# Altium PCB Remote Controller.PcbDoc
Units mm, origin at the board's own origin, x right, y up, seen from the top; angles counter-clockwise.
Board outline 123 x 88 mm, 2 copper layers (Top Layer, Bottom Layer); 117 components, 88 nets, 403 pads, 43 vias.
Unrouted connection lines stored in the file: 1.
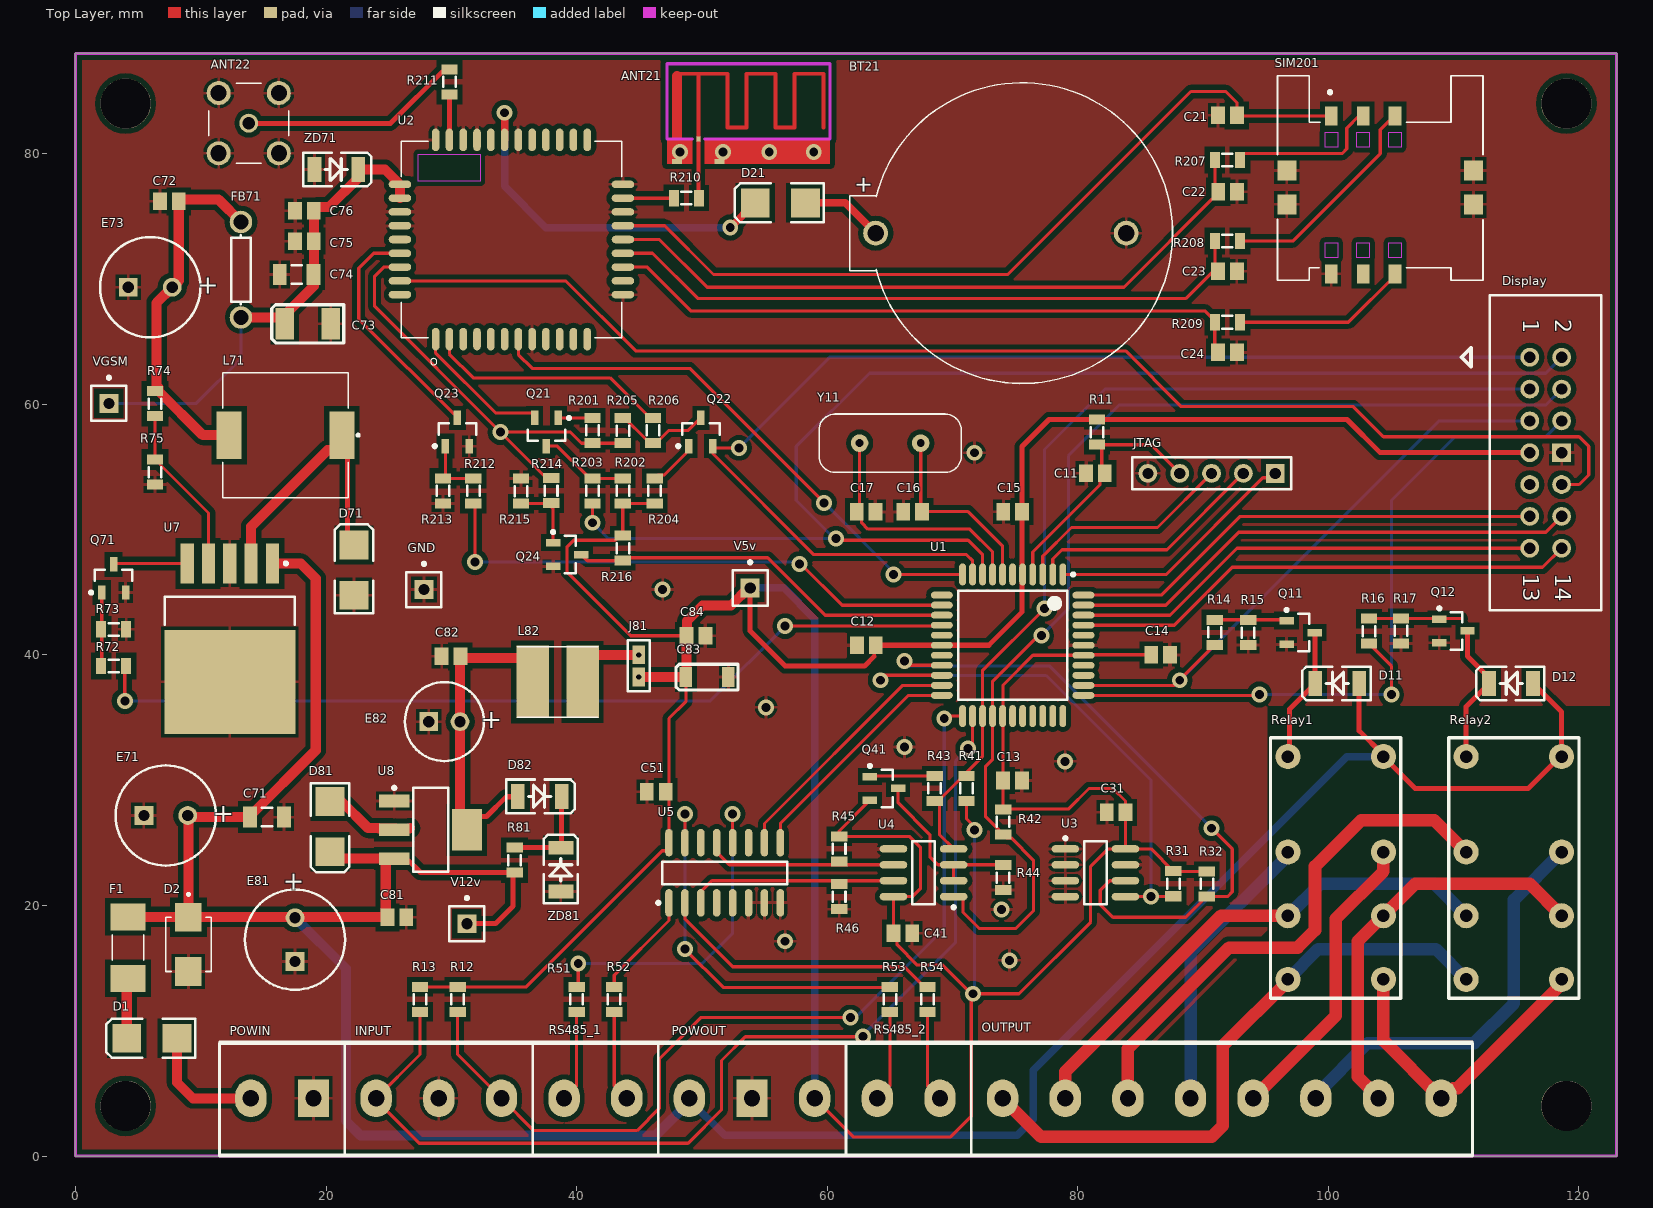
[diagram p0: Top Layer view]
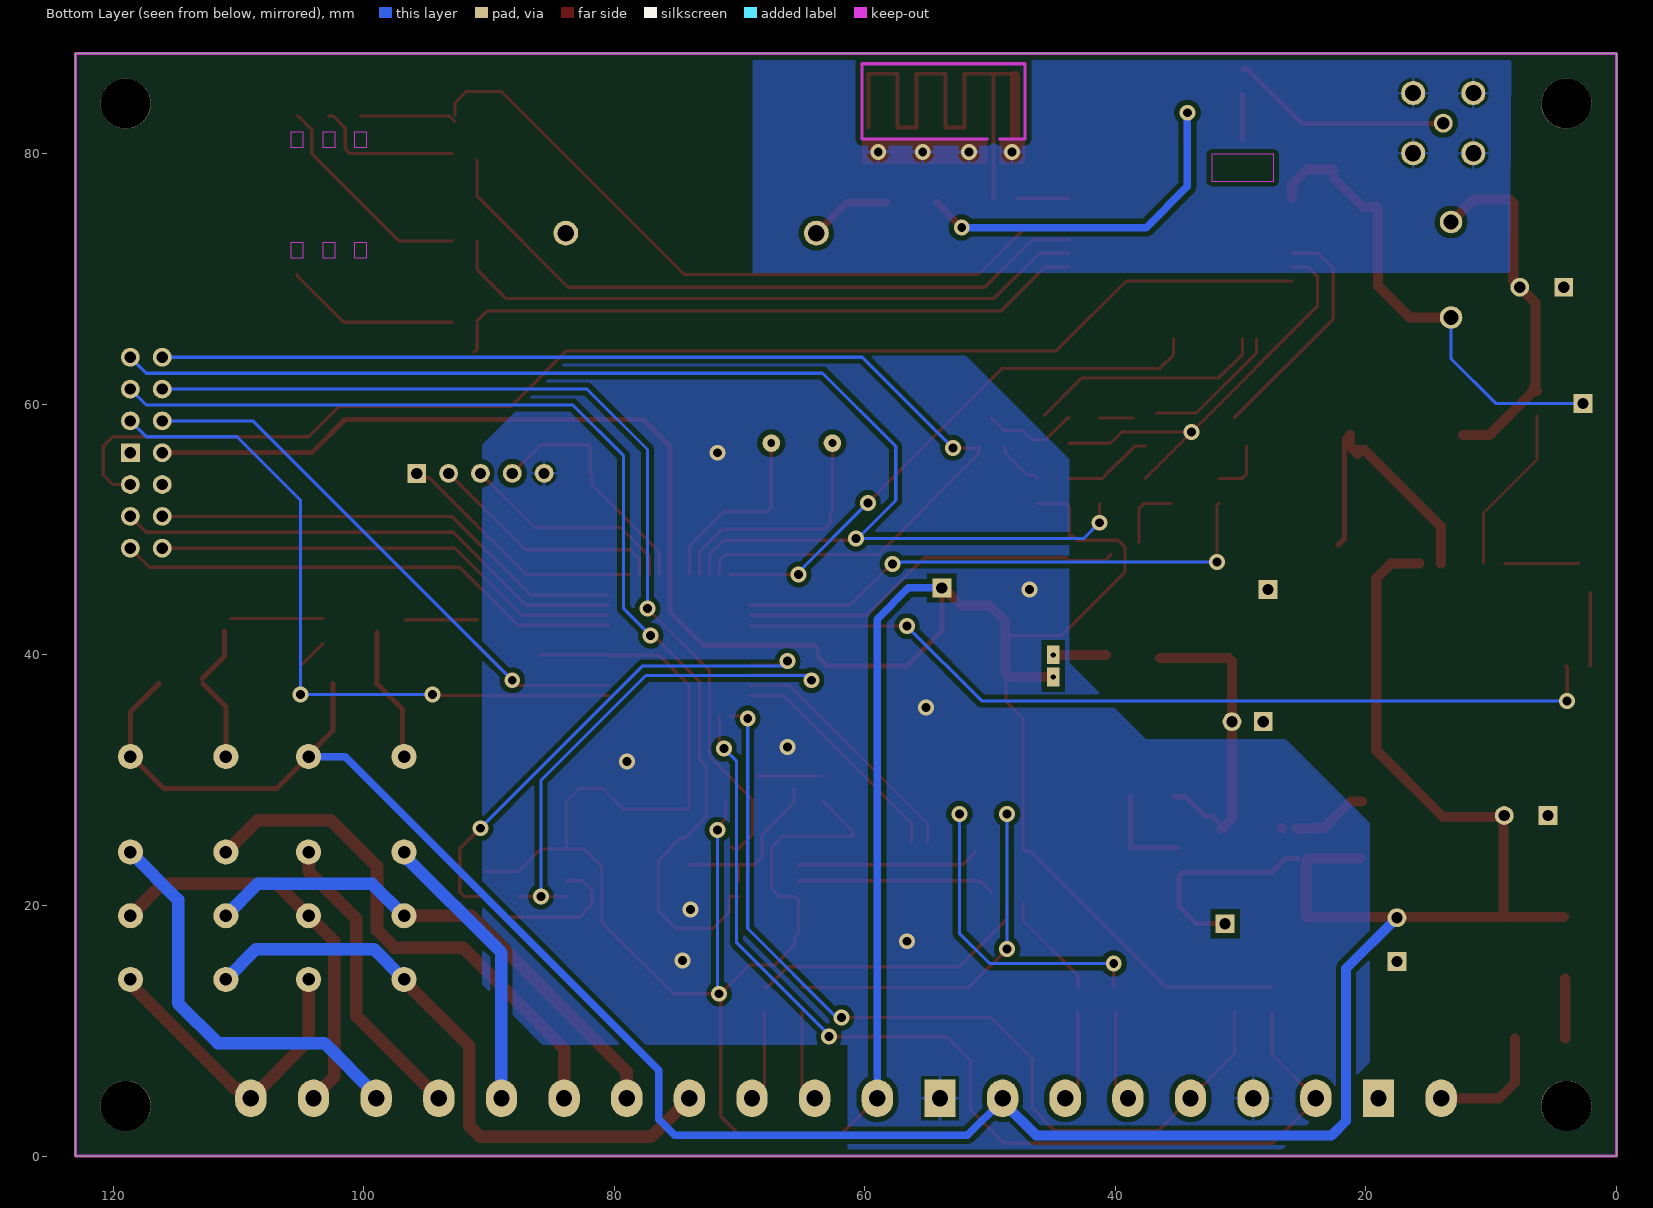
[diagram p1: Bottom Layer view, seen from below]

## Layer stack, top to bottom
Top Solder: solder mask 0.0102, Solder Resist, Dk 3.5
Top Layer: signal copper 0.0356
Dielectric 1: dielectric 0.32, FR-4, Dk 4.8
Bottom Layer: signal copper 0.0356
Bottom Solder: solder mask 0.0102, Solder Resist, Dk 3.5

## Board outline
0,0 123,0 123,88 0,88

## Design rules (kind name [scope] priority, off if disabled: settings)
Clearance [All] p1: gap=0.2 ignorepadtopadclearanceinfootprint=FALSE
ComponentClearance [All] p1: gap=0 collisioncheckmode=3 verticalgap=0 showdistances=FALSE
PolygonConnect [All] p1: connectstyle=Relief reliefconductorwidth=0.254 reliefentries=4 polygonreliefangle="90 Angle" airgapwidth=0.254
RoutingVias [All] p1: holewidth=0.711 width=1.27 viastyle="Through Hole" minholewidth=0.711 minwidth=1 maxholewidth=0.711 maxwidth=1.27
SolderMaskExpansion [All] p1: expansion=0.102 istentingtop=FALSE
Width [All] p1: maxlimit=1 minlimit=0.254 preferedwidth=0.254
29 further rules are at their usual default settings.

## Components (designator, comment, footprint, x,y, rotation, side; value= is the part's Value field where it differs from the comment)
ANT21 "PIFA_ANTENNA" PIFA_CONNECTOR 53.721,83.185 r0 top
ANT22 "SMA_CONNECTOR" LPRS_SMA_CONNECTOR 13.83,82.436 r0 top
BT21 "BH32T-C" BAT_BH32T-C 75.565,73.66 r270 top
C11 "Cap" C0805 81.407,54.483 r180 top value=100nF
C12 "Cap" C0805 63.119,40.767 r180 top value=100nF
C13 "Cap" C0805 74.791,29.972 r0 top value=100nF
C14 "Cap" C0805 86.614,40.005 r0 top value=100nF
C15 "Cap" C0805 74.803,51.435 r180 top value=100nF
C16 "Cap" C0805 66.814,51.435 r180 top value=22pF
C17 "Cap" C0805 63.107,51.435 r0 top value=22pF
C21 "Cap" C0805 91.948,83.058 r180 top value=100nF
C22 "Cap" C0805 91.96,76.962 r0 top value=22pF
C23 "Cap" C0805 91.948,70.612 r0 top value=22pF
C24 "Cap" C0805 91.948,64.135 r0 top value=22pF
C31 "Cap" C0805 83.058,27.432 r180 top value=100nF
C41 "Cap" C0805 66.04,17.78 r180 top value=100nF
C51 "Cap" C0805 46.355,29.083 r180 top value=100nF
C71 "Cap" C1206 15.287,27.051 r180 top value=1uF
C72 "Cap" C0805 7.493,76.2 r0 top value=100nF
C73 "Tantalium Cap" "Tantalium CASE B" 18.542,66.421 r0 top value=100uF
C74 "Cap" C1206 17.653,70.358 r0 top value=1uF
C75 "Cap" C0805 18.276,73.025 r0 top value=33pF
C76 "Cap" C0805 18.276,75.438 r0 top value=10pF
C81 "Cap" C0805 25.654,19.05 r180 top value=330nF
C82 "Cap" C0805 29.972,39.878 r0 top value=100nF
C83 "Tantalium Cap" "Tantalium CASE A" 50.419,38.227 r0 top value=10uF
C84 "Cap" C0805 49.53,41.529 r180 top value=100nF
D1 "1N4007" DO-214AC(SMA) 6.096,9.398 r90 top
D2 "SMBJ16A" DIOM4336X265N 9.017,16.891 r270 top
D11 "1N4148" "Mini MELF" 100.711,37.719 r180 top
D12 "1N4148" "Mini MELF" 114.582,37.719 r180 top
D21 "SS14" DO-214AC(SMA) 56.261,76.073 r90 top
D71 "SS34" DO-214AC(SMA) 22.225,46.765 r0 top
D81 "1N4007" DO-214AC(SMA) 20.32,26.289 r180 top
D82 "1N4148" "Mini MELF" 37.056,28.702 r0 top
Display "Header 7X2" HDR2X7 116.078,63.754 r270 top value="IDC Box"
E71 "94SS227X06R3EBP" E 7.211,27.178 r180 top value=220uF/25v
E73 "94SA107X0016EBP" E 5.969,69.342 r180 top value=1000uF/10v
E81 "94SA107X0016EBP" E 17.526,17.272 r270 top value=1000uF/16v
E82 "94SC226X0016DBP" D 29.444,34.671 r180 top value=220uF/16v
F1 "Fuse SMD" "FUSE SMD 2410" 4.191,16.637 r90 top value=500mA
FB71 "Ferrite Bead" AXIAL-0.3 13.208,70.739 r270 top value=270
GND "Socket" PIN1 27.813,45.212 r0 top
INPUT "KF300" HDR1X3#1 31.54,4.6 r180 top value=KF300-3P
J81 "Jumper" HDR1X2#1 44.958,40.385 r270 top
JTAG "Right Female Header 5-Pin" HDR1X5 95.758,54.483 r180 top
L71 "Inductor" "IND POWER RH74" 16.764,57.531 r180 top value=100uH
L82 "Inductor" "IND POWER CD54" 38.481,37.846 r0 top value=220uH
OUTPUT "KF129" HDR1X8 82.61,4.6 r0 top
POWIN "KF300" HDR1X2#2 17.77,4.6 r180 top value=KF300-2P
POWOUT "KF300" HDR1X3#2 51.46,4.6 r0 top value=KF300-3P
Q11 "PMBT3904" SOT-23A_N 97.79,41.783 r0 top
Q12 "PMBT3904" SOT-23A_N 109.982,41.91 r0 top
Q21 "PMBT3904" SOT-23A_N 37.592,57.785 r270 top
Q22 "PMBT3904" SOT-23A_N 49.911,57.785 r90 top
Q23 "PMBT3904" SOT-23A_N 30.48,57.785 r90 top
Q24 "PMBT3904" SOT-23A_N 39.243,48.006 r0 top
Q41 "PMBT3906" SOT-23A_N 64.534,29.337 r0 top
Q71 "PMBT3904" SOT-23A_N 3.048,46.101 r90 top
R11 "Res" R0805 81.534,57.785 r90 top value=4.7K
R12 "Res" R0805 30.5,12.5 r270 top value=4.7K
R13 "Res" R0805 27.5,12.5 r270 top value=4.7K
R14 "Res" R0805 90.932,41.799 r270 top value=4.7K
R15 "Res" R0805 93.599,41.783 r270 top value=47K
R16 "Res" R0805 103.251,41.894 r270 top value=4.7K
R17 "Res" R0805 105.791,41.91 r270 top value=47K
R31 "Res" R0805 87.63,21.733 r90 top value=10K
R32 "Res" R0805 90.297,21.717 r90 top value=10K
R41 "Res" R0805 71.12,29.337 r270 top value=220K
R42 "Res" R0805 74.041,26.67 r90 top value=220K
R43 "Res" R0805 68.58,29.337 r270 top value=7.5K
R44 "Res" R0805 74.041,22.225 r270 top value=20K
R45 "Res" R0805 60.96,24.511 r270 top value=10K
R46 "Res" R0805 60.96,20.701 r270 top value=10K
R51 "Res" R0805 40,12.5 r90 top value=10
R52 "Res" R0805 43,12.5 r90 top value=10
R53 "Res" R0805 65,12.5 r90 top value=10
R54 "Res" R0805 68,12.5 r90 top value=10
R72 "Res" R0805 3.048,39.116 r0 top value=4.7K
R73 "Res" R0805 3.048,42.037 r0 top value=47K
R74 "Res" R0805 6.35,60.055 r90 top value=2.2K
R75 "Res" R0805 6.35,54.594 r270 top value=1K
R81 "Res" R0805 35.052,23.622 r270 top value=10K
R201 "Res" R0805 41.275,57.912 r90 top value=4.7K
R202 "Res" R0805 43.688,53.086 r90 top value=4.7K
R203 "Res" R0805 41.275,53.086 r270 top value=470
R204 "Res" R0805 46.228,53.086 r90 top value=4.7K
R205 "Res" R0805 43.688,57.896 r270 top value=4.7K
R206 "Res" R0805 46.101,57.912 r270 top value=470
R207 "Res" R0805 91.948,79.502 r180 top value=47
R208 "Res" R0805 91.948,73.025 r180 top value=47
R209 "Res" R0805 91.948,66.548 r0 top value=47
R210 "Res" R0805 48.768,76.454 r180 top value=0
R211 "Res" R0805 29.845,85.725 r90 top value=0
R212 "Res" R0805 31.75,53.086 r270 top value=4.7K
R213 "Res" R0805 29.337,53.086 r270 top value=47K
R214 "Res" R0805 37.973,53.102 r90 top value=4.7K
R215 "Res" R0805 35.56,53.07 r90 top value=47K
R216 "Res" R0805 43.688,48.514 r90 top value=4.7K
Relay1 "2C Relay 12V" "Relay v23105-a5001-a201" 100.584,22.987 r270 top
Relay2 "2C Relay 12V" "Relay v23105-a5001-a201" 114.808,22.987 r270 top
RS485_1 "KF300" HDR1X2#3 40.23,4.6 r0 top value=KF300-2P
RS485_2 "KF300" HDR1X2#3 65.23,4.6 r0 top value=KF300-2P
SIM201 "SIM Card Holder 6PIN" "SIM Card Holder" 104.14,76.708 r180 top
U1 "ATmega32A-AU" 44A_N 74.803,40.767 r270 top
U2 "SIM800C" LCC110P1570X1760X250-42N 34.798,73.152 r90 top
U3 "AT24C02BN-SP25-B" 8S1_N 81.407,22.606 r0 top
U4 "MAX485CSA" NSO8_N 67.691,22.606 r180 top
U5 "HEF4052BT" 751B-05_N 51.816,22.606 r90 top
U7 "LM2596S-ADJ" TS5B_N 12.319,41.296 r270 top
U8 "Volt Reg" SOT223_N 28.342,26.035 r0 top
V5v "Socket" PIN1 53.848,45.339 r0 top
V12v "Socket" PIN1 31.242,18.542 r0 top
VGSM "Socket" PIN1 2.667,60.071 r0 top
Y11 "Crystal Oscillator" "XTAL THD" 65.024,56.896 r180 top value="11.0592 MHz"
ZD71 "Diode Zener" "Mini MELF" 20.828,78.74 r0 top value=5.1v
ZD81 "Diode Zener" "Mini MELF" 38.735,22.86 r90 top value=5.6v

## Footprints (in the part's own frame and the unit in brackets; to place one, negate y for a bottom-side part, rotate by r counter-clockwise, add the part's x,y. Pads: shape width x height; smd on the part's side, far side on the other; paste and mask are expansions set on the pad)
8S1_N [mm] "SOIC, 8-Leads, Body 4.9x3.9mm, Pitch 1.27mm, IPC Medium Density"
  oval 2.2x0.6 smd: 1(-2.4,1.905) 2(-2.4,0.635) 3(-2.4,-0.635) 4(-2.4,-1.905) 5(2.4,-1.905) 6(2.4,-0.635) 7(2.4,0.635) 8(2.4,1.905)
  silkscreen extent -2.52,-2.5 0.9,2.88, body extent -2,-2.5 2,2.5, height 1.75
44A_N [mm] "Thin QFP, 44-Leads, Body 10x10mm, Pitch 0.8mm, IPC Medium Density"
  oval 1.75x0.55 smd: 1(-5.65,4) 2(-5.65,3.2) 3(-5.65,2.4) 4(-5.65,1.6) 5(-5.65,0.8) 6(-5.65,0) 7(-5.65,-0.8) 8(-5.65,-1.6) 9(-5.65,-2.4) 10(-5.65,-3.2) 11(-5.65,-4) 23(5.65,-4) 24(5.65,-3.2) 25(5.65,-2.4) 26(5.65,-1.6) 27(5.65,-0.8) 28(5.65,0) 29(5.65,0.8) 30(5.65,1.6) 31(5.65,2.4) 32(5.65,3.2) 33(5.65,4)
  oval 0.55x1.75 smd: 12(-4,-5.65) 13(-3.2,-5.65) 14(-2.4,-5.65) 15(-1.6,-5.65) 16(-0.8,-5.65) 17(0,-5.65) 18(0.8,-5.65) 19(1.6,-5.65) 20(2.4,-5.65) 21(3.2,-5.65) 22(4,-5.65) 34(4,5.65) 35(3.2,5.65) 36(2.4,5.65) 37(1.6,5.65) 38(0.8,5.65) 39(0,5.65) 40(-0.8,5.65) 41(-1.6,5.65) 42(-2.4,5.65) 43(-3.2,5.65) 44(-4,5.65)
  silkscreen extent -5.77,-4.35 4.35,4.95, body extent -5,-5 5,5, height 1.2
751B-05_N [mm] "SOIC, 16-Leads, Body 9.9x3.9mm, Pitch 1.27mm, IPC Medium Density"
  oval 2.2x0.6 smd: 1(-2.4,4.445) 2(-2.4,3.175) 3(-2.4,1.905) 4(-2.4,0.635) 5(-2.4,-0.635) 6(-2.4,-1.905) 7(-2.4,-3.175) 8(-2.4,-4.445) 9(2.4,-4.445) 10(2.4,-3.175) 11(2.4,-1.905) 12(2.4,-0.635) 13(2.4,0.635) 14(2.4,1.905) 15(2.4,3.175) 16(2.4,4.445)
  silkscreen extent -2.52,-5 0.9,5.42, body extent -2,-5 2,5, height 1.75
AXIAL-0.3 [mm] "Axial Device, Thru-Hole; 2 Leads; 0.3 in Pin Spacing"
  round 1.8 hole 1.2: 1(-3.81,0) 2(3.81,0)
  silkscreen extent -2.77,-0.76 2.77,0.76
BAT_BH32T-C [mil]
  round 78 hole 52: NEG(0,326.77) POS(0,-460.63)
  silkscreen extent -473,-541 473,472, body extent -475,-535 475,475, height 310
C0805 [mm] "Chip Capacitor, Body 2.0x1.3mm, IPC High Density"
  rect 1.1x1.4 smd: 1(-0.75,0) 2(0.75,0)
  body extent -1.1,-0.72 1.1,0.72, height 1.4
C1206 [mm] "Chip Capacitor, Body 3.2x1.6mm, IPC High Density"
  rect 1.1x1.7 smd: 1(-1.35,0) 2(1.35,0)
  silkscreen extent -0.4,-0.75 0.4,0.75, body extent -1.7,-0.9 1.7,0.9, height 1.3
D [mm] "Capacitor, Electrolytic, Radial; Body 6.3 x 9.8 mm (Dia.xH typ); Pin Spacing 2.5 mm (typ)"
  round 1.5 hole 0.9: 1(-1.25,0)
  rect 1.5x1.5 hole 0.9: 2(1.25,0)
  silkscreen extent -3.15,-3.15 3.15,3.15
DIOM4336X265N [mm]
  rect 2.28x2.12 smd: A(2.165,0) C(-2.165,0)
  silkscreen extent -4.1,-1.81 2.16,1.81
DO-214AC(SMA) [mm]
  rect 2.3x2.3 smd: 1(0,-2.003) 2(0,2.003)
  silkscreen extent -1.55,-3.45 1.55,3.65, body extent -1.4,-2.75 1.4,2.75, height 2.6
E [mm] "Capacitor, Electrolytic, Radial; Body 8 x 10.5 mm (Dia.xH typ); Pin Spacing 3.5 mm (typ)"
  round 1.5 hole 0.9: 1(-1.75,0)
  rect 1.5x1.5 hole 0.9: 2(1.75,0)
  silkscreen extent -4,-4 4,4
"FUSE SMD 2410" [mm]
  rect 2.15x2.8 smd: 1(-2.455,0) 2(2.455,0)
  silkscreen extent -1,-1.27 1,1.27
HDR1X2#1 [mm] "Connector; Header; 2 Position"
  rect 1.5x1 hole 0.4: 1(0.38,0) 2(2.16,0)
  silkscreen extent -0.76,-0.89 3.3,0.89
HDR1X2#2 [mm] "Connector; Header; 2 Position"
  rect 2.5x3 hole 1.3: 1(-1.23,0)
  oval 2.5x3 hole 1.3: 2(3.77,0)
  silkscreen extent -3.73,-4.5 6.27,4.5
HDR1X2#3 [mm] "Connector; Header; 2 Position"
  oval 2.5x3 hole 1.3: 1(-1.23,0) 2(3.77,0)
  silkscreen extent -3.73,-4.5 6.27,4.5
HDR1X3#1 [mm] "Connector; Header; 3 Position"
  oval 2.5x3 hole 1.3: 1(-2.46,0) 2(2.54,0) 3(7.54,0)
  silkscreen extent -4.96,-4.5 10.04,4.5
HDR1X3#2 [mm] "Connector; Header; 3 Position"
  oval 2.5x3 hole 1.3: 1(-2.46,0) 3(7.54,0)
  rect 2.5x3 hole 1.3: 2(2.54,0)
  silkscreen extent -4.96,-4.5 10.04,4.5
HDR1X5 [mm] "Connector; Header; 5 Position"
  rect 1.5x1.5 hole 0.9: 1(0,0)
  round 1.5 hole 0.9: 2(2.54,0) 3(5.08,0) 4(7.62,0) 5(10.16,0)
  silkscreen extent -1.27,-1.27 11.43,1.27
HDR1X8 [mm] "Connector; Header; 8 Position"
  oval 2.5x3 hole 1.3: 1(-8.61,0) 2(-3.61,0) 3(1.39,0) 4(6.39,0) 5(11.39,0) 6(16.39,0) 7(21.39,0) 8(26.39,0)
  silkscreen extent -11.11,-4.5 28.89,4.5
HDR2X7 [mm] "Connector; Header; 7x2 Position"
  round 1.5 hole 0.9: 1(0,0) 2(0,2.54) 3(2.54,0) 4(2.54,2.54) 5(5.08,0) 6(5.08,2.54) 7(7.62,0) 9(10.16,0) 10(10.16,2.54) 11(12.7,0) 12(12.7,2.54) 13(15.24,0) 14(15.24,2.54)
  rect 1.5x1.5 hole 0.9: 8(7.62,2.54)
  silkscreen extent -4.96,-3.18 20.19,5.72
"IND POWER CD54" [mm] "SMD Power Inductor ; Size:5*5*4"
  rect 2.6x5.8 smd: 1(-2,0) 2(2,0)
  silkscreen extent -3.21,-2.81 3.21,2.81, body extent -2,-2 2,2, height 4.5
"IND POWER RH74" [mm] "SMD Power Inductor ; Size:7*7*4"
  rect 2x3.8 smd: 1(-4.5,0) 2(4.5,0)
  silkscreen extent -5.89,-5 5,5
LCC110P1570X1760X250-42N [mm]
  oval 1.8x0.6 smd: 1(-7.95,6.05) 2(-7.95,4.95) 3(-7.95,3.85) 4(-7.95,2.75) 5(-7.95,1.65) 6(-7.95,0.55) 7(-7.95,-0.55) 8(-7.95,-1.65) 9(-7.95,-2.75) 10(-7.95,-3.85) 11(-7.95,-4.95) 12(-7.95,-6.05) 22(7.95,-6.05) 23(7.95,-4.95) 24(7.95,-3.85) 25(7.95,-2.75) 26(7.95,-1.65) 27(7.95,-0.55) 28(7.95,0.55) 29(7.95,1.65) 30(7.95,2.75) 31(7.95,3.85) 32(7.95,4.95) 33(7.95,6.05)
  oval 0.6x1.8 smd: 13(-4.4,-8.9) 14(-3.3,-8.9) 15(-2.2,-8.9) 16(-1.1,-8.9) 17(0,-8.9) 18(1.1,-8.9) 19(2.2,-8.9) 20(3.3,-8.9) 21(4.4,-8.9) 34(4.4,8.9) 35(3.3,8.9) 36(2.2,8.9) 37(1.1,8.9) 38(0,8.9) 39(-1.1,8.9) 40(-2.2,8.9) 41(-3.3,8.9) 42(-4.4,8.9)
  Keep-Out Layer region: 6.8,2.483 4.656,2.483 4.656,7.43 6.8,7.43
  silkscreen extent -10,-8.8 7.85,8.8
LPRS_SMA_CONNECTOR [mm]
  round 1.508 hole 1: 1(0,0)
  round 1.92 hole 1.28: G1(-2.4,2.4) G2(-2.4,-2.4) G3(2.4,-2.4) G4(2.4,2.4)
  silkscreen extent -3.2,-3.2 3.2,3.2, body extent -3.25,-3.25 3.25,3.25, height 13.6
"Mini MELF" [mm] "Mini MELF; 3.5mm*1.45mm"
  rect 1.1x2 smd: 1(-1.75,0) 2(1.75,0)
  silkscreen extent -2.67,-1.35 2.79,1.35
NSO8_N [mm] "SOIC, 8-Leads, Body 4.9x3.9mm, Pitch 1.27mm, IPC Medium Density"
  oval 2.2x0.6 smd: 1(-2.4,1.905) 2(-2.4,0.635) 3(-2.4,-0.635) 4(-2.4,-1.905) 5(2.4,-1.905) 6(2.4,-0.635) 7(2.4,0.635) 8(2.4,1.905)
  silkscreen extent -2.53,-2.5 0.9,2.88, body extent -2,-2.5 2,2.5, height 1.75
PIFA_CONNECTOR [mm]
  rect 0.3x0.4 smd: 1(-4,-2)
  rect 0.8x0.4 smd mask+0.102: G1(-5.7,-3.8) G2(-2.3,-3.8)
  Top Layer region: -3.5,-2 6.5,-2 6.5,-4 -3.5,-4
  Top Layer region: -6.5,-2 -4.5,-2 -4.5,-4 -6.5,-4
  Top Layer pour cut-out: 10,-2
  Top Layer pour cut-out: 10,-2
  Top Layer lines w0.3: -5.7,3.2 -4,3.2 ; -4,-2 -4,3.2 ; 5.99,-1.1 5.99,3.2 3.66,3.2 3.66,-1.1 2.16,-1.1 2.16,3.2 -0.17,3.2 -0.17,-1.1 -1.67,-1.1 -1.67,3.2 -4,3.2
  Top Layer lines w0.8: -5.7,-1.905 -5.7,3
  Keep-Out Layer lines w0.254: -4.5,-2 -6.5,-2 -6.5,4 6.5,4 6.5,-2 -3.5,-2
PIN1 [mm] "Connector; Plug"
  rect 1.5x1.5 hole 0.9: 1(0,0)
  silkscreen extent -1.4,-1.4 1.4,2.17
R0805 [mm] "Chip Resistor, Body 2x1.3mm, IPC High Density"
  rect 0.8x1.3 smd: 1(-1,0) 2(1,0)
  silkscreen extent -0.4,-0.5 0.4,0.5, body extent -1.05,-0.65 1.05,0.65, height 0.9
"Relay v23105-a5001-a201" [mm]
  round 2 hole 1: 1(-8.89,-3.81) 4(-1.27,-3.81) 6(3.81,-3.81) 8(8.89,-3.81) 9(8.89,3.81) 11(3.81,3.81) 13(-1.27,3.81) 16(-8.89,3.81)
  silkscreen extent -10.4,-5.2 10.4,5.2, body extent -10.14,-4.99 10.06,5.01, height 11.41
"SIM Card Holder" [mm] "6 Position Card Connector SIM Card Surface Mount, Right Angle Gold"
  rect 1x1.5 smd: 1(3.9,-6.3) 2(1.36,-6.3) 3(-1.18,-6.3) 4(3.9,6.3) 5(1.36,6.3) 6(-1.18,6.3)
  rect 1.5x1.6 smd: S1(-7.45,0.75) S2(-7.45,-1.95) S3(7.45,0.75) S4(7.45,-1.95)
  Keep-Out Layer region: -0.68,3.8 -1.68,3.8 -1.68,5 -0.68,5
  Keep-Out Layer region: 1.86,3.8 0.86,3.8 0.86,5 1.86,5
  Keep-Out Layer region: 4.4,3.8 3.4,3.8 3.4,5 4.4,5
  Keep-Out Layer region: -0.68,-5 -1.68,-5 -1.68,-3.8 -0.68,-3.8
  Keep-Out Layer region: 1.86,-5 0.86,-5 0.86,-3.8 1.86,-3.8
  Keep-Out Layer region: 4.4,-5 3.4,-5 3.4,-3.8 4.4,-3.8
  silkscreen extent -8.2,-9.5 8.2,6.8
SOT223_N [mm] "SOT223, 4-Leads, Body 6.5x3.5mm, Pitch 2.3mm, Lead Span 7mm, IPC Medium Density"
  rect 2.4x1 smd: 1(-2.9,2.3) 2(-2.9,0) 3(-2.9,-2.3)
  rect 2.4x3.3 smd: 4(2.9,0)
  silkscreen extent -3.02,-3.35 1.4,3.47, body extent -1.85,-3.35 1.85,3.35, height 1.7
SOT-23A_N [mm] "SOT23, 3-Leads, Body 2.9x1.3mm, Pitch 0.95mm, Lead Span 2.3mm, IPC Medium Density"
  rect 1.15x0.6 smd: 1(-1.125,0.95) 2(-1.125,-0.95) 3(1.125,0)
  silkscreen extent -1.25,-1.5 0.7,1.92, body extent -0.7,-1.5 0.7,1.5, height 1.09
"Tantalium CASE A" [mm]
  rect 1x1.6 smd paste+0.038 mask+0.038: 1(-1.7,0) 2(1.7,0)
  silkscreen extent -2.5,-1.02 2.45,1.02, body extent -1.7,-0.9 1.7,0.9, height 1.8
"Tantalium CASE B" [mm]
  rect 1.5x2.5 smd paste+0.038 mask+0.038: 1(-1.831,0) 2(1.832,0)
  silkscreen extent -2.88,-1.53 2.88,1.53, body extent -1.83,-1.4 1.83,1.4, height 1.95
TS5B_N [mm] "D2-PAK, 6-Leads, Body 8.6x10.2mm, Pitch 1.7mm, Lead Span 14.1mm, IPC Medium Density"
  rect 3.2x1.05 smd: 1(-6,3.4) 2(-6,1.7) 3(-6,0) 4(-6,-1.7) 5(-6,-3.4)
  rect 8.3x10.45 smd: 6(3.45,0)
  silkscreen extent -6.12,-5.2 -1.1,5.2, body extent -3.35,-5.2 6.05,5.2, height 4.65
"XTAL THD" [mm]
  round 1.4 hole 0.63: 1(-2.44,0) 2(2.44,0)
  silkscreen extent -5.68,-2.33 5.68,2.33

## Part data
ANT21: "RF Connectors / Printed and Surface-mount Antenna", Package=None, Availability="In Stock", Check_prices=https://www.snapeda.com/parts/SMA%20CONNECTOR/LPRS/view-part/?ref=eda, MF=LPRS, MP="SMA CONNECTOR", Price=None, Purchase-URL="https://pricing.snapeda.com/search/part/SMA CONNECTOR/?ref=eda", SnapEDA_Link=https://www.snapeda.com/parts/SMA%20CONNECTOR/LPRS/view-part/?ref=snap
ANT22: "RF Connectors / Coaxial Connectors SMA Coaxial Right angled", Package=None, Availability="In Stock", Check_prices=https://www.snapeda.com/parts/SMA%20CONNECTOR/LPRS/view-part/?ref=eda, MF=LPRS, MP="SMA CONNECTOR", Price=None, Purchase-URL="https://pricing.snapeda.com/search/part/SMA CONNECTOR/?ref=eda", SnapEDA_Link=https://www.snapeda.com/parts/SMA%20CONNECTOR/LPRS/view-part/?ref=snap
BT21: "BATTERY HOLDER COIN 20MM PC PIN", Package=None, Availability="In Stock", Check_prices=https://www.snapeda.com/parts/BH32T-C/Memory+Protection+Devices/view-part/?ref=eda, MF=MPD, MP=BH32T-C, Price=None, Purchase-URL=https://pricing.snapeda.com/search/part/BH32T-C/?ref=eda, SnapEDA_Link=https://www.snapeda.com/parts/BH32T-C/Memory+Protection+Devices/view-part/?ref=snap
C11 C12 C13 C14 C15 C16 C17 C21 C22 C23 C24 C31 C41 C51 C71 C72 C74 C75 C76 C81 C82 C84: "Capacitor"
C73 C83: library part "Cap Pol2", "Polarized Capacitor Tantalium"
D1 D81: library part Diode, "Default Diode", Code_JEDEC=DO-214-AB, LatestRevisionDate=17-Jul-2002, LatestRevisionNote="Re-released for DXP Platform.", PackageDescription="DO-214-AB/SMC; 2 C-Bend Leads; Body 7.9 x 5.9 mm, inc. leads (LxW)", PackageReference=SMC, PackageVersion=Sep-1996, Published=8-Jun-2000, Publisher="Altium Limited"
D2: library part SMBJ12A, "15.6V Clamp 17.5A Ipp Tvs Diode Surface Mount DO-214AA (SMB)", Package="SMB-2 Fairchild Semiconductor", Availability="In Stock", Check_prices=https://www.snapeda.com/parts/SMBJ12A/Onsemi/view-part/?ref=eda, MF="ON Semiconductor", MP=SMBJ12A, Price=None, Purchase-URL=https://pricing.snapeda.com/search/part/SMBJ12A/?ref=eda, SnapEDA_Link=https://www.snapeda.com/parts/SMBJ12A/Onsemi/view-part/?ref=snap
D11 D12 D82: library part "Diode 1N4148", "High Conductance Fast Diode", PackageDescription=Diode
D21: library part 1N6095, "Schottky Rectifier", ComponentLink1Description="Manufacturer Link", ComponentLink1URL=http://www.irf.com/, ComponentLink2Description=Datasheet, ComponentLink2URL=http://www.irf.com/product-info/datasheets/data/1n6096.pdf, DatasheetVersion=Dec-1997, LatestRevisionDate=17-Jul-2002, LatestRevisionNote="Re-released for DXP Platform.", Note="No PCB Footprint Available", PackageReference=DO-203AA, Published=8-Jun-2000, Publisher="Altium Limited"
D71: library part SS36, "Schottky Rectifier", PackageDescription="DO-214-AB/SMC; 2 C-Bend Leads; Body 7.9 x 5.9 mm, inc. leads (LxW)"
Display: "Header, 7-Pin, Dual row", LatestRevisionDate=17-Jul-2002, LatestRevisionNote="Re-released for DXP Platform.", Publisher="Altium Limited"
E71: "Solid Aluminum Capacitor with Organic Semiconductor Electrolyte: 220uF, 6.3V, Bulk Pack", ComponentLink1Description="Manufacturer Link", ComponentLink1URL=http://www.vishay.com/, ComponentLink2Description=Datasheet, ComponentLink2URL=http://www.vishay.com/docs/90008/94ss.pdf, DatasheetDocument=23-May-2001, DrillSize="Nominal, Rounded to the nearest 0.1mm", Note="Part Numbers shown are for ± 20% capacitance tolerance (X0).", PackageReference=E, PCB_Layout="Complies with Manufacturer's Recommendation.", Published=19-Mar-2004, Publisher="Altium Limited"
E73 E81: "Solid Aluminum Capacitor with Organic Semiconductor Electrolyte: 100uF, 16V, Bulk Pack", ComponentLink1Description="Manufacturer Link", ComponentLink1URL=http://www.vishay.com/, ComponentLink2Description=Datasheet, ComponentLink2URL=http://www.vishay.com/docs/90003/94sa.pdf, DatasheetDocument=29-Jun-2001, DrillSize="Nominal, Rounded to the nearest 0.1mm", Note="Part Numbers shown are for ± 20% capacitance tolerance (X0).", PackageReference=E, PCB_Layout="Complies with Manufacturer's Recommendation.", Published=19-Mar-2004, Publisher="Altium Limited"
E82: "Solid Aluminum Capacitor with Organic Semiconductor Electrolyte: 22uF, 16V, Bulk Pack", ComponentLink1Description="Manufacturer Link", ComponentLink1URL=http://www.vishay.com/, ComponentLink2Description=Datasheet, ComponentLink2URL=http://www.vishay.com/docs/90004/94sc.pdf, DatasheetDocument=23-May-2001, DrillSize="Nominal, Rounded to the nearest 0.1mm", Note="Part Numbers shown are for ± 20% capacitance tolerance (X0).", PackageReference=D, PCB_Layout="Complies with Manufacturer's Recommendation.", Published=19-Mar-2004, Publisher="Altium Limited"
F1: "2410 SMT Fuse", Package="SMD-2 Bel Fuse", Availability=Warning, MF="Bel Fuse", MP=0679L1000-05, Price=None, Purchase-URL=https://pricing.snapeda.com/search/part/0679L1000-05/?ref=eda, SnapEDA_Link=https://www.snapeda.com/parts/0679L1000-05/Bel%20Fuse/view-part/1313867/?ref=snap
INPUT POWOUT: library part "Header 3", "Header, 3-Pin", LatestRevisionDate=17-Jul-2002, LatestRevisionNote="Re-released for DXP Platform.", Publisher="Altium Limited"
J81 POWIN RS485_1 RS485_2: library part "Header 2", "Header, 2-Pin", LatestRevisionDate=17-Jul-2002, LatestRevisionNote="Re-released for DXP Platform.", Publisher="Altium Limited"
JTAG: library part "Header 5", "Header, 5-Pin", LatestRevisionDate=17-Jul-2002, LatestRevisionNote="Re-released for DXP Platform.", Publisher="Altium Limited"
L71 L82: "Inductor SMD", PackageDescription=Inductor
OUTPUT: library part "Header 8", "Header, 8-Pin", LatestRevisionDate=17-Jul-2002, LatestRevisionNote="Re-released for DXP Platform.", Publisher="Altium Limited"
Q11 Q12 Q21 Q22 Q23 Q24 Q71: library part BC817-25, "NPN General Purpose Amplifier", ComponentLink1Description="Manufacturer Link", ComponentLink1URL=http://www.fairchildsemi.com/, ComponentLink2Description="Discontinuation Notice", ComponentLink2URL=http://www.fairchildsemi.com/obsolete/obs.jsp, DatasheetVersion=1997, LatestRevisionDate=20-Nov-2009, LatestRevisionNote="IPC-7351 Footprint Added.", PackageDescription="3-Pin SOT-23 Package 0.95 mm Pitch, 2.3 mm Lead Span", PackageReference=SOT-23A, PackageVersion=Sep-1998, Published=8-Jun-2000, Publisher="Altium Limited"
Q41: library part BC807-25, "PNP General Purpose Amplifier", ComponentLink1Description="Manufacturer Link", ComponentLink1URL=http://www.fairchildsemi.com/, ComponentLink2Description=Datasheet, ComponentLink2URL=http://www.fairchildsemi.com/ds/BC%2FBC807.pdf, DatasheetVersion=1997, LatestRevisionDate=20-Nov-2009, LatestRevisionNote="IPC-7351 Footprint Added.", PackageDescription="3-Pin SOT-23 Package 0.95 mm Pitch, 2.3 mm Lead Span", PackageReference=SOT-23A, PackageVersion=Sep-1998, Published=8-Jun-2000, Publisher="Altium Limited"
R11 R12 R13 R14 R15 R16 R17 R31 R32 R41 R42 R43 R44 R45 R46 R51 R52 R53 R54 R72 R73 R74 R75 R81 R201 R202 R203 R204 R205 R206 R207 R208 R209 R210 R211 R212 R213 R214 R215 R216: "Resistor", PackageDescription="Chip Resistor"
Relay1 Relay2: library part Relay-8Pin, "2C Telecommunication Relay"
SIM201: "6 Position Card Connector SIM Card Surface Mount, Right Angle Gold", Package=None, Availability=Unavailable, MF="Wurth Electronics", MP=693010020611, Price=None, SnapEDA_Link=https://www.snapeda.com/parts/693010020611/Wurth%20Electronics%20Inc./view-part/514470/?ref=snap
U1: "8-bit AVR Microcontroller, 2.7-5.5V, 16MHz, 32KB Flash, 1KB EEPROM, 2KB SRAM, 44-pin TQFP, Industrial Grade (-40°C to 85°C)", Code_JEDEC=MS-026-ACB, ComponentLink1Description="Manufacturer URL", ComponentLink1URL=http://www.atmel.com/, ComponentLink2Description="ATmega32A Datasheet", ComponentLink2URL=http://www.atmel.com/dyn/resources/prod_documents/doc8155.pdf, ComponentLink3Description="ATmega32A Summary", ComponentLink3URL=http://www.atmel.com/dyn/resources/prod_documents/8155S.pdf, DatasheetVersion="revC, Feb-2011", PackageDescription="44-Pin Plastic Thin Profile Quad Flat Pack, 10 x 10 x 1.0 mm Body, 0.8 mm Pitch (TQFP)", PackageReference=44A, PackageVersion="revC, Oct-2010"
U2: "Module: GSM/Bluetooth; GPRS; 2G; 1800MHz, 900MHz; 85.6kbps; SMD", Package=None, Availability=Unavailable, MF=Simcom, MP=SIM800C, Price=None, SnapEDA_Link=https://www.snapeda.com/parts/SIM800C/SIMcom%20Wireless%20solutions%20Co.%2CLtd/view-part/571323/?ref=snap
U3: "2Kbit (256 x 8), 2-wire Bus Automotive Serial EEPROM with full memory Write Protect, 2.5V, 8-Pin SOIC, Bulk", Code_IPC=SOIC127P600-8, Code_JEDEC=MS-012-AA, ComponentLink1Description="Manufacturer Link", ComponentLink1URL=http://www.atmel.com/products/serial/default.asp, ComponentLink2Description=Datasheet, ComponentLink2URL=http://www.atmel.com/dyn/resources/prod_documents/doc8517.pdf, ComponentLink3Description="Atmel.com Home", ComponentLink3URL=http://www.atmel.com, DatasheetVersion="8517C,  Jan-2009", PackageDescription="8-Lead (0.150\" Wide Body), Plastic Gull Wing Small Outline (JEDEC SOIC)", PackageReference=8S1, PackageVersion="revC, Mar-2005", Published=20-Sep-2010, Publisher="Altium Limited"
U4: "Low-Power, Slew-Rate-Limited RS-485/RS-422 Transceiver", Code_IPC=SOIC127P600-8, Code_JEDEC=MS-012-AA, ComponentLink1Description="Manufacturer Link", ComponentLink1URL=http://www.maxim-ic.com/, ComponentLink2Description=Datasheet, ComponentLink2URL=http://pdfserv.maxim-ic.com/en/ds/MAX1487-MAX491.pdf, DatasheetVersion=Feb-1996, LatestRevisionDate=13-Apr-2006, LatestRevisionNote="IPC-7351 Footprint Added.", PackageDescription="8-Pin Small Outline Integrated Circuit 1.27 mm Pitch", PackageReference=NSO8, Published=16-Jan-2001, Publisher="Altium Limited"
U5: library part MC14052BD, "Dual 4-Channel Analog Multiplexer/Demultiplexer", Code_IPC=SOIC127P600-16, Code_JEDEC=MS-012-AC, ComponentLink1Description="Manufacturer Link", ComponentLink1URL=http://www.onsemi.com/, ComponentLink2Description=Datasheet, ComponentLink2URL=http://www.onsemi.com/pub/Collateral/MC14051B-D.PDF, DatasheetVersion=1995, LatestRevisionDate=13-Apr-2006, LatestRevisionNote="IPC-7351 Footprint Added.", PackageDescription="16-Pin Small Outline Integrated Circuit 1.27 mm Pitch", PackageReference=751B-05, PackageVersion=Oct-1999, Published=15-Apr-2002, Publisher="Altium Limited"
U7: "SIMPLE SWITCHER® Power Converter 150 KHz 3A Step-Down Voltage Regulator, 5-pin TO-263", PackageDescription="TO-263, Molded, .400 x .390 x .180in, 5 Lead, .067in Pitch, Surface Mount", PartNumber=LM2596S-ADJ, PinCount=5
U8: "SMD Voltage Regulator", PackageDescription="Molded SOT-223, 6.50 x 3.56 x 1.6mm Body, 4 Lead, 2.3mm Pitch"
Y11: "10MHz ±30ppm Crystal 18pF 60 Ohms", Package="HC49/US ECS International", Digi-Key_Part_Number=X1080-ND, MF="ECS Inc.", MP=ECS-100-18-4X, SnapEDA_Link=https://www.snapeda.com/parts/ECS-100-18-4X/ECS%20Inc./view-part/583488/?ref=snap
ZD71 ZD81: "Zener Diode", PackageDescription="Zener Diode"
FB71: PackageDescription="Chip Inductor"
GND V5v V12v VGSM: LatestRevisionDate=17-Jul-2002, LatestRevisionNote="Re-released for DXP Platform.", Publisher="Altium Limited"

## Free pads (board coordinates)
  round 4 hole 4 unplated: 0(4,4) 0(4,84) 0(119,4) 0(119,84)

## Via types
v1: diameter 1.27, hole 0.711, Top Layer to Bottom Layer, tented both sides, 43 vias

## Nets (pads, with @x,y where several pads share a name; then routed paths per layer and width w, separated by ;. In a path a pad name is that pad's centre, name@x,y a point inside that pad or via, vN(x,y) a via of type N, cw(c..) or ccw(c..) an arc to the next point about the centre after c; other vN are vias at no path point)
+3.8: C73.1 C74.2 C75.2 C76.2 FB71.2 U2.34 U2.35 VGSM.1 ZD71.2 | length 37.8
  Top Layer w0.8: FB71.2 16.51,66.929 19.026,69.445 19.026,70.358 C75.2 19.026,75.588 19.176,75.738 20.239,75.738 ZD71.2@22.563,78.062 ; ZD71.2 24.71,78.74 U2.34 U2.35
  Bottom Layer w0.254: VGSM.1 9.652,60.071 13.208,63.627 FB71.2
+5: C12.1 C13.1 C14.1 C15.1 C31.1 C41.2 C51.1 C83.1 C84.2 Display.7 J81.2 POWOUT.3 Q41.2 R11.2 R12.1 R13.1 R31.2 R32.2 R41.2 R42.2 R45.1 R202.1 R204.1 R216.2 U1.5 U1.17 U1.27 U1.38 U3.8 U4.8 U5.16 V5v.1 | length 336.9
  Top Layer w0.254: R13.1 R12.1 35.979,13.5 46.839,24.36 47.211,24.36 47.371,24.52 U5.16 47.371,29.083 47.371,34.925 48.719,36.273 C83.1 ; R216.2 43.438,49.514 43.073,49.149 39.768,49.149 39.243,48.624 39.243,46.609 44.323,41.529 C84.2 ; R216.2@43.688,49.784 43.688,51.816 43.958,52.086 R204.1 ; POWOUT.3 62.076,1.524 69.85,1.524 71.501,3.175 v1@71.501,12.954 ; Q41.2 60.96,25.938 R45.1 66.564,25.511 67.437,24.638 67.437,21.336 66.802,20.701 65.532,20.701 65.291,20.46 C41.2 ; 63.754,39.878 63.754,40.513 C12.1@64.008,40.767 ; C41.2 65.575,17.495 65.575,16.848 67.183,15.24 69.215,15.24 v1@71.501,12.954 ; R41.2 71.12,26.924 v1@71.742,26.302 ; C15.1 C15.1@75.565,51.423 ; U1.38 76.416,39.967 74.041,37.592 74.041,35.117 C13.1 74.041,27.686 79.248,27.686 80.899,29.337 82.804,29.337 83.808,28.333 C31.1 ; U1.38@80.453,40.005 C14.1 ; C31.1 83.807,24.651 83.877,24.581 U3.8@83.947,24.511 ; R32.2 87.646,22.717 R31.2 85.852,24.511 U3.8@83.947,24.511 ; v1@71.501,12.954 75.311,12.954 81.026,18.669 81.026,23.114 82.423,24.511 U3.8 U3.8@83.947,24.511
  Top Layer w0.4: V5v.1 53.848,41.91 56.642,39.116 62.992,39.116 63.754,39.878 ; C12.1@64.008,40.767 U1.17 72.898,40.767 75.565,43.434 75.565,46.417 C15.1@75.565,51.423 ; C15.1 75.553,56.63 77.708,58.785 R11.2 101.489,58.785 104.14,56.134 Display.7@116.629,56.134
  Top Layer w0.8: J81.2 48.385,38.225 48.78,38.62 C84.2 48.813,41.562 48.813,42.717 50.038,43.942 52.324,43.942 V5v.1@53.785,45.402
  Bottom Layer w0.254: v1@71.755,13.081 v1(71.755,26.035)
  Bottom Layer w0.6: V5v.1 56.515,45.339 59,42.854 POWOUT.3
  other v1: 71.628,12.954
+12: C71.2 C81.2 D2.C D11.1 D12.1 D81.2 E71.1 E81.1 F1.2 POWOUT.1 R81.2 Relay1.16 Relay2.16 U7.1 U8.3 V12v.1 | length 232.5
  Top Layer w0.4: U8.3 26.43,23.735 27.543,22.622 34.655,22.622 34.925,22.352 34.925,19.939 33.528,18.542 V12v.1 ; D11.1 102.461,33.937 104.394,32.004 Relay1.16 106.934,29.337 115.951,29.337 118.618,32.004 118.618,35.433 D12.1
  Top Layer w0.8: F1.2 D2.C@9.017,19.092 ; D2.C D2.C@9.017,19.092 ; U7.1 17.982,47.296 19.177,46.101 19.177,32.385 13.843,27.051 9.017,27.051 D2.C@9.017,19.092 ; D81.2@20.447,23.749 24.638,23.749 24.765,23.622 24.765,19.092 D2.C@9.017,19.092
  Bottom Layer w0.6: POWOUT.1@49,4.468 51.817,1.651 75.184,1.651 76.454,2.921 76.454,6.858 101.473,31.877 Relay1.16
  Bottom Layer w0.8: E81.1 21.59,14.958 21.59,2.794 22.733,1.651 46.315,1.651 49,4.336 49,4.468 POWOUT.1
A1: R51.1 RS485_1.1 | length 7.3
  Top Layer w0.254: RS485_1.1 40,5.6 R51.1
A2: R53.1 RS485_2.1 | length 7.3
  Top Layer w0.254: RS485_2.1 65,5.6 R53.1
B1: R52.1 RS485_1.2 | length 7.3
  Top Layer w0.254: R52.1 43,5.6 RS485_1.2
B2: R54.1 RS485_2.2 | length 7.3
  Top Layer w0.254: R54.1 68,5.6 RS485_2.2
GND: ANT21.G1 ANT21.G2 ANT22.G1 ANT22.G2 ANT22.G3 ANT22.G4 BT21.NEG C11.2 C12.2 C13.2 C14.2 C15.2 C16.2 C17.2 C21.2 C22.2 C23.2 C24.2 C31.2 C41.1 C51.2 C71.1 C72.1 C73.2 C74.1 C75.1 C76.1 C81.1 C82.1 C83.2 C84.1 D2.A D71.1 Display.8 E71.2 E73.2 E81.2 E82.2 GND.1 INPUT.2 JTAG.5 POWIN.1 POWOUT.2 Q11.2 Q12.2 Q23.2 Q24.2 Q71.2 R15.2 R17.2 R44.2 R46.2 R73.2 R75.2 R213.2 R215.2 SIM201.4 SIM201.S1 SIM201.S2 SIM201.S3 SIM201.S4 U1.39 U2.8 U2.13 U2.19 U2.21 U2.27 U2.30 U2.31 U2.33 U2.36 U2.37 U3.1 U3.2 U3.3 U3.4 U3.7 U4.5 U5.6 U5.7 U5.8 U7.3 U7.6 U8.1 ZD71.1 ZD81.1
  other v1: 74.549,15.621 56.642,17.145 73.914,19.685 78.994,31.496 66.167,32.639 55.118,35.814 46.863,45.212 71.755,56.134 48.26,80.137 51.689,80.137 55.372,80.137 58.928,80.137
NetANT21_1: ANT21.1 R210.1 | length 4.7
  Top Layer w0.3: R210.1@49.721,76.454 ANT21.1
NetANT22_1: ANT22.1 R211.2 | length 17.8
  Top Layer w0.254: R211.2@29.829,86.741 R211.2
  Top Layer w0.4: ANT22.1 13.843,82.423 25.146,82.423 29.464,86.741 R211.2@29.829,86.741
NetBT21_POS: BT21.POS D21.1 | length 6.6
  Top Layer w0.6: D21.1 61.452,76.073 BT21.POS
NetC11_1: C11.1 JTAG.4 R11.1 U1.4 | length 19.7
  Top Layer w0.254: U1.4 76.403,48.209 81.777,53.583 81.777,54.345 81.915,54.483 81.915,56.642 82.042,56.769 85.852,56.769 JTAG.4
NetC16_1: C16.1 U1.7 Y11.1 | length 15.2
  Top Layer w0.254: Y11.1 67.464,51.789 67.818,51.435 71.247,51.435 74.003,48.679 U1.7
NetC17_1: C17.1 U1.8 Y11.2 | length 19.6
  Top Layer w0.254: Y11.2 62.584,51.435 62.743,51.276 62.743,50.541 63.246,50.038 71.374,50.038 73.203,48.209 U1.8
NetC21_1: C21.1 SIM201.1 U2.18 | length 65.8
  Top Layer w0.254: U2.18 47.033,74.252 50.927,70.358 74.422,70.358 89.027,84.963 91.821,84.963 92.698,84.086 C21.1 ; C21.1@92.71,82.55 93.168,83.008 SIM201.1
NetC22_1: C22.1 R207.2 U2.17 | length 54.7
  Top Layer w0.254: U2.17 46.609,73.152 50.419,69.342 83.693,69.342 90.948,76.597 R207.2
NetC23_1: C23.1 R208.2 U2.16 | length 52
  Top Layer w0.254: U2.16 46.058,72.052 49.657,68.453 88.646,68.453 90.805,70.612 90.775,70.612 90.948,70.785 R208.2
NetC24_1: C24.1 R209.1 U2.15 | length 51.4
  Top Layer w0.254: U2.15 45.634,70.952 49.149,67.437 90.17,67.437 R209.1@90.932,66.675 ; R209.1@90.932,66.421 90.932,64.401 C24.1
NetC72_2: C72.2 E73.1 FB71.1 L71.2 R74.2 | length 28.7
  Top Layer w0.8: R74.2 6.636,61.055 10.16,57.531 L71.2 ; R74.2@6.62,61.325 6.477,61.468 6.477,68.1 E73.1 8.243,69.866 8.243,76.061 8.509,76.327 11.43,76.327 FB71.1
NetC82_2: C82.2 D81.1 D82.1 E82.1 L82.1 U8.2 U8.4 | length 31
  Top Layer w0.4: U8.4 31.242,26.093 32.242,27.093 32.808,27.093 34.39,28.675 35.279,28.675 D82.1
  Top Layer w0.8: D81.1 21.238,28.292 23.368,26.162 24.181,26.162 24.208,26.135 25.342,26.135 U8.2 U8.2@25.542,26.135 ; 26.676,26.135 26.703,26.162 ; U8.4@31.559,26.098 30.694,26.964 E82.1 30.694,39.457 30.988,39.751 L82.1@36.449,39.751
NetD1_1: D1.1 POWIN.2 | length 10
  Top Layer w0.8: D1.1 8.099,5.871 9.37,4.6 POWIN.2
NetD1_2: D1.2 F1.1 | length 4.8
  Top Layer w0.8: D1.2 F1.1@4.093,14.182
NetD11_2: D11.2 Q11.3 Relay1.1 | length 10.8
  Top Layer w0.254: Relay1.1 Relay1.1@96.901,32.004
  Top Layer w0.4: Relay1.1@96.901,32.004 96.901,35.659 D11.2 ; D11.2@98.915,37.719 Q11.3
NetD12_2: D12.2 Q12.3 Relay2.1 | length 11.2
  Top Layer w0.4: Relay2.1 110.998,35.885 D12.2 ; Q12.3 111.107,39.896 D12.2@112.903,38.1
NetD21_2: D21.2 U2.28 | length 30.2
  Top Layer w0.6: U2.28 v1(34.248,83.27) ; v1(52.261,74.105) 54.229,76.073 D21.2
  Bottom Layer w0.6: v1(34.248,83.27) 34.248,77.385 37.529,74.104 v1(52.261,74.105)
NetD71_2: D71.2 L71.1 U7.2 | length 23.3
  Top Layer w0.4: L71.1@21.209,57.785 21.717,57.277 21.717,49.276 D71.2
  Top Layer w0.8: U7.2 14.019,50.226 20.124,56.331 L71.1@20.664,56.331 ; L71.1@20.664,56.031 21.264,56.631 L71.1
NetD82_2: D82.2 R81.1 ZD81.2 | length 7.8
  Top Layer w0.4: R81.1 38.719,24.622 38.806,24.709 D82.2
NetDisplay_5: Display.5 R14.2 U1.35 | length 48.5
  Top Layer w0.254: U1.35 87.7,37.567 R14.2
  Bottom Layer w0.254: v1@88.011,37.846 88.265,38.1 108.839,58.674 Display.5
  other v1: 88.138,37.973
NetDisplay_6: Display.6 R16.2 U1.34 | length 61.2
  Top Layer w0.254: U1.34 v1@94.552,36.767 ; R16.2 105.029,39.116 v1(105.029,36.83)
  Bottom Layer w0.254: v1(94.488,36.83) v1(105.029,36.83) 105.029,52.324 110.109,57.404 117.348,57.404 Display.6
NetDisplay_10: Display.10 U2.41 | length 105.1
  Top Layer w0.254: U2.41 39.114,69.852 44.704,64.262 83.82,64.262 88.265,59.817 101.981,59.817 104.394,57.404 120.015,57.404 120.777,56.642 120.777,54.356 120.015,53.594 Display.10
NetDisplay_11: Display.11 U1.44 | length 38.1
  Top Layer w0.254: U1.44 86.677,44.767 92.964,51.054 Display.11@115.954,51.054
NetDisplay_12: Display.12 U1.43 | length 41.1
  Top Layer w0.254: U1.43 87.02,43.967 92.837,49.784 117.348,49.784 Display.12
NetDisplay_13: Display.13 U1.42 | length 38.3
  Top Layer w0.254: U1.42 87.363,43.167 92.71,48.514 Display.13@116.547,48.514
NetDisplay_14: Display.14 U1.41 | length 40.7
  Top Layer w0.254: U1.41 87.706,42.367 92.329,46.99 117.094,46.99 Display.14
NetINPUT_1: INPUT.1 R12.2 U1.23 | length 71.8
  Top Layer w0.254: R12.2 30.5,8.1 INPUT.1 34,4.608 36.576,2.032 44.831,2.032 46.609,3.81 46.609,7.747 49.911,11.049 v1(61.849,11.049) ; v1@69.342,35.117 U1.23
  Bottom Layer w0.254: v1@62.103,10.922 69.342,18.161 v1(69.342,34.925)
NetINPUT_3: INPUT.3 R13.2 U1.24 | length 83.6
  Top Layer w0.254: INPUT.3 INPUT.3@24.003,4.603 ; R13.2 27.5,8.1 INPUT.3@24.003,4.603 ; v1(62.865,9.525) 53.467,9.525 51.562,7.62 51.562,3.683 48.895,1.016 27.432,1.016 24.003,4.445 INPUT.3@24.003,4.603 ; v1(71.247,32.512) 71.603,32.868 U1.24
  Bottom Layer w0.254: INPUT.3 INPUT.3@24.003,4.603 ; v1@62.966,9.753 70.231,17.018 70.231,31.496 v1(71.247,32.512)
NetJ81_1: J81.1 L82.2 | length 4.2
  Top Layer w0.8: L82.2@40.767,40.005 J81.1
NetJTAG_1: JTAG.1 U1.1 | length 20.3
  Top Layer w0.254: U1.1 87.057,46.417 94.776,54.136 95.411,54.136 JTAG.1
NetJTAG_2: JTAG.2 U1.2 | length 19.3
  Top Layer w0.254: U1.2 78.003,47.65 78.74,48.387 87.122,48.387 JTAG.2
NetJTAG_3: JTAG.3 U1.3 | length 17.7
  Top Layer w0.254: U1.3 77.203,47.866 79.502,50.165 86.36,50.165 JTAG.3
NetOUTPUT_1: OUTPUT.1 Relay1.8 Relay2.8 | length 49.5
  Top Layer w1: OUTPUT.1 77.076,1.524 90.678,1.524 91.567,2.413 91.567,8.763 96.901,14.097 Relay1.8
  Bottom Layer w1: Relay1.8 99.187,16.51 108.585,16.51 Relay2.8
NetOUTPUT_2: OUTPUT.2 Relay1.6 Relay2.6 | length 41.4
  Top Layer w1: OUTPUT.2 79,6.737 91.44,19.177 Relay1.6
  Bottom Layer w1: Relay1.6 99.314,21.717 108.458,21.717 Relay2.6
NetOUTPUT_3: OUTPUT.3 Relay2.4 | length 42.5
  Top Layer w1: OUTPUT.3 84,8.562 92.075,16.637 97.536,16.637 98.933,18.034 98.933,23.114 102.616,26.797 108.458,26.797 Relay2.4
NetOUTPUT_4: OUTPUT.4 Relay1.4 | length 22.9
  Bottom Layer w1: OUTPUT.4 89,16.229 96.774,24.003 Relay1.4
NetOUTPUT_5: OUTPUT.5 Relay1.13 | length 24
  Top Layer w1: OUTPUT.5 100.584,11.184 100.584,18.923 104.388,22.727 104.388,24.251 Relay1.13
NetOUTPUT_6: OUTPUT.6 Relay2.13 | length 32.8
  Bottom Layer w1: OUTPUT.6 99,4.874 103.143,9.017 111.633,9.017 114.808,12.192 114.808,20.447 Relay2.13
NetOUTPUT_7: OUTPUT.7 Relay1.11 Relay2.11 | length 32.4
  Top Layer w1: OUTPUT.7 104,4.675 102.362,6.313 102.362,17.145 106.934,21.717 116.078,21.717 Relay2.11
NetOUTPUT_8: OUTPUT.8 Relay1.9 Relay2.9 | length 25.2
  Top Layer w1: Relay1.9 104.394,9.206 OUTPUT.8 109.156,4.6 109.974,5.419 110.321,5.419 118.427,13.525 118.427,13.906 Relay2.9
NetQ11_1: Q11.1 R14.1 R15.1 | length 5.7
  Top Layer w0.254: R14.1 Q11.1@96.665,42.799
NetQ12_1: Q12.1 R16.1 R17.1 | length 7.4
  Top Layer w0.254: R16.1 110.635,42.894
NetQ21_1: Q21.1 R201.2 | length 2.7
  Top Layer w0.254: Q21.1 R201.2@41.275,58.91
NetQ21_2: Q21.2 U2.1 | length 11
  Top Layer w0.254: U2.1 28.748,64.089 33.528,59.309 Q21.2@36.703,59.309
NetQ21_3: Q21.3 R202.2 R203.1 | length 7.2
  Top Layer w0.254: Q21.3 38.463,56.66 40.752,54.371 40.752,54.359 41.025,54.086 R202.2
NetQ22_1: Q22.1 R204.2 | length 4
  Top Layer w0.254: R204.2 46.501,54.359 46.993,54.359 48.788,56.154 48.788,56.487 Q22.1
NetQ22_3: Q22.3 R205.1 R206.2 | length 7.6
  Top Layer w0.254: R205.1 R205.1@43.72,58.896 ; R205.1@43.815,58.928 45.593,57.15 46.609,57.15 47.371,57.912 48.913,57.912 Q22.3
NetQ23_1: Q23.1 R212.1 R213.1 | length 4.6
  Top Layer w0.254: Q23.1 29.53,54.417 29.861,54.086 R212.1
NetQ23_3: Q23.3 U2.39 | length 19
  Top Layer w0.254: U2.39 23.792,72.052 22.606,70.866 22.606,66.802 30.498,58.91 Q23.3
NetQ24_1: Q24.1 R214.1 R215.1 | length 5.4
  Top Layer w0.254: R215.1 37.719,52.07 38.118,51.671 Q24.1
NetQ24_3: Q24.3 R216.1 U1.14 | length 31
  Top Layer w0.254: Q24.3 40.86,47.514 R216.1 43.926,47.752 55.245,47.752 59.83,43.167 U1.14
NetQ41_1: Q41.1 R43.1 | length 5.2
  Top Layer w0.254: Q41.1@63.409,30.337 R43.1
NetQ41_3: Q41.3 R44.1 U4.2 U4.3 | length 13.7
  Top Layer w0.254: Q41.3 65.659,28.194 68.199,25.654 68.199,23.876 68.834,23.241 U4.3 ; U4.2 70.091,22.974 70.358,23.241 R44.1@74.041,23.241
NetQ71_1: Q71.1 R72.1 R73.1 | length 5.9
  Top Layer w0.254: R72.1@2.098,39.116 Q71.1
NetQ71_3: Q71.3 U7.5 | length 5.9
  Top Layer w0.254: Q71.3@3.048,47.296 U7.5
NetR45_2: R45.2 U4.6 U5.13 | length 14.5
  Top Layer w0.254: U5.13@51.181,24.257 52.197,23.241 U4.6
NetR46_1: R46.1 U4.7 U5.3 | length 15.7
  Top Layer w0.254: U5.3@49.911,21.082 50.8,21.971 60.96,21.971 U4.7
NetR51_2: R51.2 U5.12 | length 26.6
  Top Layer w0.254: R51.2 40.132,13.632 v1@40.132,14.859 ; U5.12 v1(52.451,27.305)
  Bottom Layer w0.254: v1(40.132,15.367) 50.038,15.367 52.451,17.78 v1(52.451,27.305)
NetR52_2: R52.2 U5.1 | length 8.5
  Top Layer w0.254: R52.2 43,14.425 47.371,18.796 U5.1
NetR53_2: R53.2 U5.15 | length 30.8
  Top Layer w0.254: v1(48.641,16.51) 51.689,13.462 65.024,13.462 65,13.486 R53.2 ; U5.15 v1(48.641,27.305)
  Bottom Layer w0.254: v1(48.641,16.51) v1(48.641,27.305)
NetR54_2: R54.2 U5.2 | length 22.9
  Top Layer w0.254: U5.2 48.641,18.923 52.451,15.113 66.137,15.113 67.75,13.5 R54.2
NetR72_2: R72.2 U1.15 | length 70.6
  Top Layer w0.254: v1(3.937,36.322) 3.937,39.005 R72.2 ; v1(56.642,42.291) 69.077,42.291 U1.15
  Bottom Layer w0.254: v1(3.937,36.322) 50.673,36.322 v1(56.642,42.291)
NetR74_1: R74.1 R75.1 U7.4 | length 13.5
  Top Layer w0.254: R74.1 R75.1 10.619,51.325 U7.4
NetR201_1: R201.1 R205.2 R214.2 U2.40 | length 34.3
  Top Layer w0.254: U2.40 24.597,70.952 23.876,70.231 23.876,67.818 v1(33.909,57.785) ; R214.2@37.592,54.102 v1(33.909,57.785) ; R205.2 40.386,56.896 39.497,57.785 v1(33.909,57.785)
NetR206_1: R206.1 U2.2 | length 19
  Top Layer w0.254: U2.2 29.848,64.005 31.75,62.103 42.672,62.103 45.578,59.197 45.578,59.185 45.625,59.138 R206.1@45.637,59.138
NetR207_1: R207.1 SIM201.2 | length 12
  Top Layer w0.254: R207.1@92.948,80.01 101.092,80.01 101.473,80.391 101.473,82.042 102.439,83.008 SIM201.2
NetR208_1: R208.1 SIM201.3 | length 17.6
  Top Layer w0.254: R208.1 97.155,73.025 104.14,80.01 104.14,81.915 105.233,83.008 SIM201.3
NetR209_2: R209.2 SIM201.6 | length 14.1
  Top Layer w0.254: R209.2 101.6,66.548 105.32,70.268 SIM201.6
NetR210_2: R210.2 U2.20 | length 4.1
  Top Layer w0.3: U2.20@43.7,76.454 R210.2
NetR211_1: R211.1 U2.32 | length 3.6
  Top Layer w0.4: U2.32 R211.1@29.848,84.725
NetR212_2: R212.2 U1.13 | length 43.1
  Top Layer w0.254: R212.2 31.891,51.945 v1(31.891,47.417) ; v1(57.785,47.244) 57.912,47.244 61.189,43.967 U1.13
  Bottom Layer w0.254: v1(31.891,47.417) v1@57.513,47.417
NetU1_11: U1.11 U2.7 | length 44.3
  Top Layer w0.254: U2.7 35.348,63.966 36.449,62.865 49.022,62.865 v1(59.753,52.133) ; v1(65.278,46.417) U1.11
  Bottom Layer w0.254: v1(59.753,52.133) 65.47,46.417 v1(65.278,46.417)
NetU1_21: U1.21 U5.10 | length 20.3
  Top Layer w0.254: U5.10 54.991,26.543 66.015,37.567 U1.21
NetU1_22: U1.22 U5.9 | length 18.7
  Top Layer w0.254: U5.9 56.261,26.543 66.485,36.767 U1.22
RXD1: Display.2 R203.2 U1.9 | length 107.3
  Top Layer w0.254: v1@41.275,51.054 R203.2 ; v1@60.806,49.149 71.247,49.149 72.403,47.993 U1.9
  Bottom Layer w0.254: v1(41.275,50.546) 42.545,49.276 v1@60.579,49.276 ; v1(60.706,49.276) v1@60.579,49.276 ; Display.2 117.348,62.484 63.373,62.484 57.531,56.642 57.531,52.324 v1@60.579,49.276
RXD2: Display.4 R42.1 U1.26 U4.1 | length 91.1
  Top Layer w0.254: U4.1 70.678,20.701 70.837,20.541 70.837,19.46 72.136,18.161 75.057,18.161 76.454,19.558 76.454,23.622 74.679,25.397 74.314,25.397 R42.1 72.644,27.067 72.644,31.115 73.203,31.674 U1.26 73.203,37.897 v1@76.962,41.656
  Bottom Layer w0.254: v1(77.089,41.529) 79.248,43.688 79.248,55.88 83.312,59.944 117.348,59.944 Display.4
SCL: R32.1 U1.19 U3.6 | length 53.7
  Top Layer w0.254: v1@66.167,39.167 U1.19 ; U3.6 82.55,21.971 81.788,21.209 81.788,20.066 82.804,19.05 88.63,19.05 R32.1 91.964,20.717 92.329,21.082 92.329,24.511 v1(90.678,26.162)
  Bottom Layer w0.254: v1@66.421,39.116 77.724,39.116 v1(90.678,26.162)
  other v1: 66.167,39.497
SDA: R31.1 U1.20 U3.5 | length 42.8
  Top Layer w0.254: v1@64.262,38.367 U1.20 ; U3.5 v1(85.852,20.701) R31.1@87.63,20.701
  Bottom Layer w0.254: v1@64.516,38.354 77.47,38.354 85.852,29.972 v1(85.852,20.701)
  other v1: 64.262,37.973
TXD1: Display.1 Q22.2 U1.10 | length 94.7
  Top Layer w0.254: Q22.2 50.88,56.641 Q22.2@50.88,56.522 ; v1(52.966,56.522) Q22.2@50.88,56.522 ; U1.10 71.603,47.523 71.12,48.006 58.928,48.006 50.88,56.054 Q22.2@50.88,56.522
  Bottom Layer w0.254: v1(52.966,56.522) 60.198,63.754 Display.1@116.605,63.754
TXD2: Display.3 R41.1 R43.2 U1.25 U4.4 | length 77.1
  Top Layer w0.254: U4.4@70.623,24.671 70.463,24.511 U4.4 68.961,25.641 68.961,28.448 72.39,31.877 72.39,38.735 v1(77.343,43.688)
  Bottom Layer w0.254: v1(77.343,43.688) 77.343,56.388 82.169,61.214 Display.3
pads on no net: Display.9 SIM201.5 U1.6 U1.12 U1.16 U1.18 U1.28 U1.29 U1.30 U1.31 U1.32 U1.33 U1.36 U1.37 U1.40 U2.3 U2.4 U2.5 U2.6 U2.9 U2.10 U2.11 U2.12 U2.14 U2.22 U2.23 U2.24 U2.25 U2.26 U2.29 U2.38 U2.42 U5.4 U5.5 U5.11 U5.14

## Polygon pours and split planes (outlines as drawn)
GND on Bottom Layer "GND_L02_P003" (solid, pour order 3): 8.382,88.011 68.834,88.011 68.961,87.884 68.961,70.485 8.636,70.485 8.509,70.612
GND on Bottom Layer "GND_L02_P002" (solid, pour order 2): 61.341,0 61.341,8.89 85.725,8.89 90.551,13.716 90.551,56.769 83.439,63.881 51.943,63.881 43.688,55.626 43.688,39.37 37.592,33.274 26.416,33.274 19.685,26.543 19.685,7.493 27.178,0
GND on Top Layer "GND_L01_P001" (solid, pour order 1): 123,88 123,36.005 122.936,35.941 95.123,35.941 95.123,18.034 86.106,9.017 61.595,9.017 61.468,9.144 61.468,0.032 61.5,0 0,0 0,88

## Keep-outs
Keep-Out Layer:
  the board outline again, w0.254

## Silkscreen, mask and mechanical layers (free items; w line width, h text height)
Top Overlay:
  lines w0.254: 11.5,0 11.5,9 111.5,9 111.5,0 11.5,0
  lines w0.3: 110.617,63.754 111.379,62.992 111.379,64.516 110.617,63.754

## Text inside footprints (layer, text, board x,y; h text height)
BT21: Top Overlay "+" at 62.365,78.24 h1.27 r270
Display: Top Overlay "13" at 115.57,46.482 h1.27 r270; Top Overlay "14" at 118.11,46.482 h1.27 r270; Top Overlay "1" at 115.57,66.802 h1.27 r270; Top Overlay "2" at 118.11,66.802 h1.27 r270
E71: Top Overlay "+" at 12.686,27.928 h1.5 r180
E73: Top Overlay "+" at 11.444,70.092 h1.5 r180
E81: Top Overlay "+" at 16.776,22.747 h1.5 r270
E82: Top Overlay "+" at 34.069,35.421 h1.5 r180